# Altium PCB PCB1.PcbDoc
Units mm, origin at the board's own origin, x right, y up, seen from the top; angles counter-clockwise.
Board outline 32.77 x 38.86 mm, 2 copper layers (Top Layer, Bottom Layer); 43 components, 27 nets, 114 pads, 7 vias.
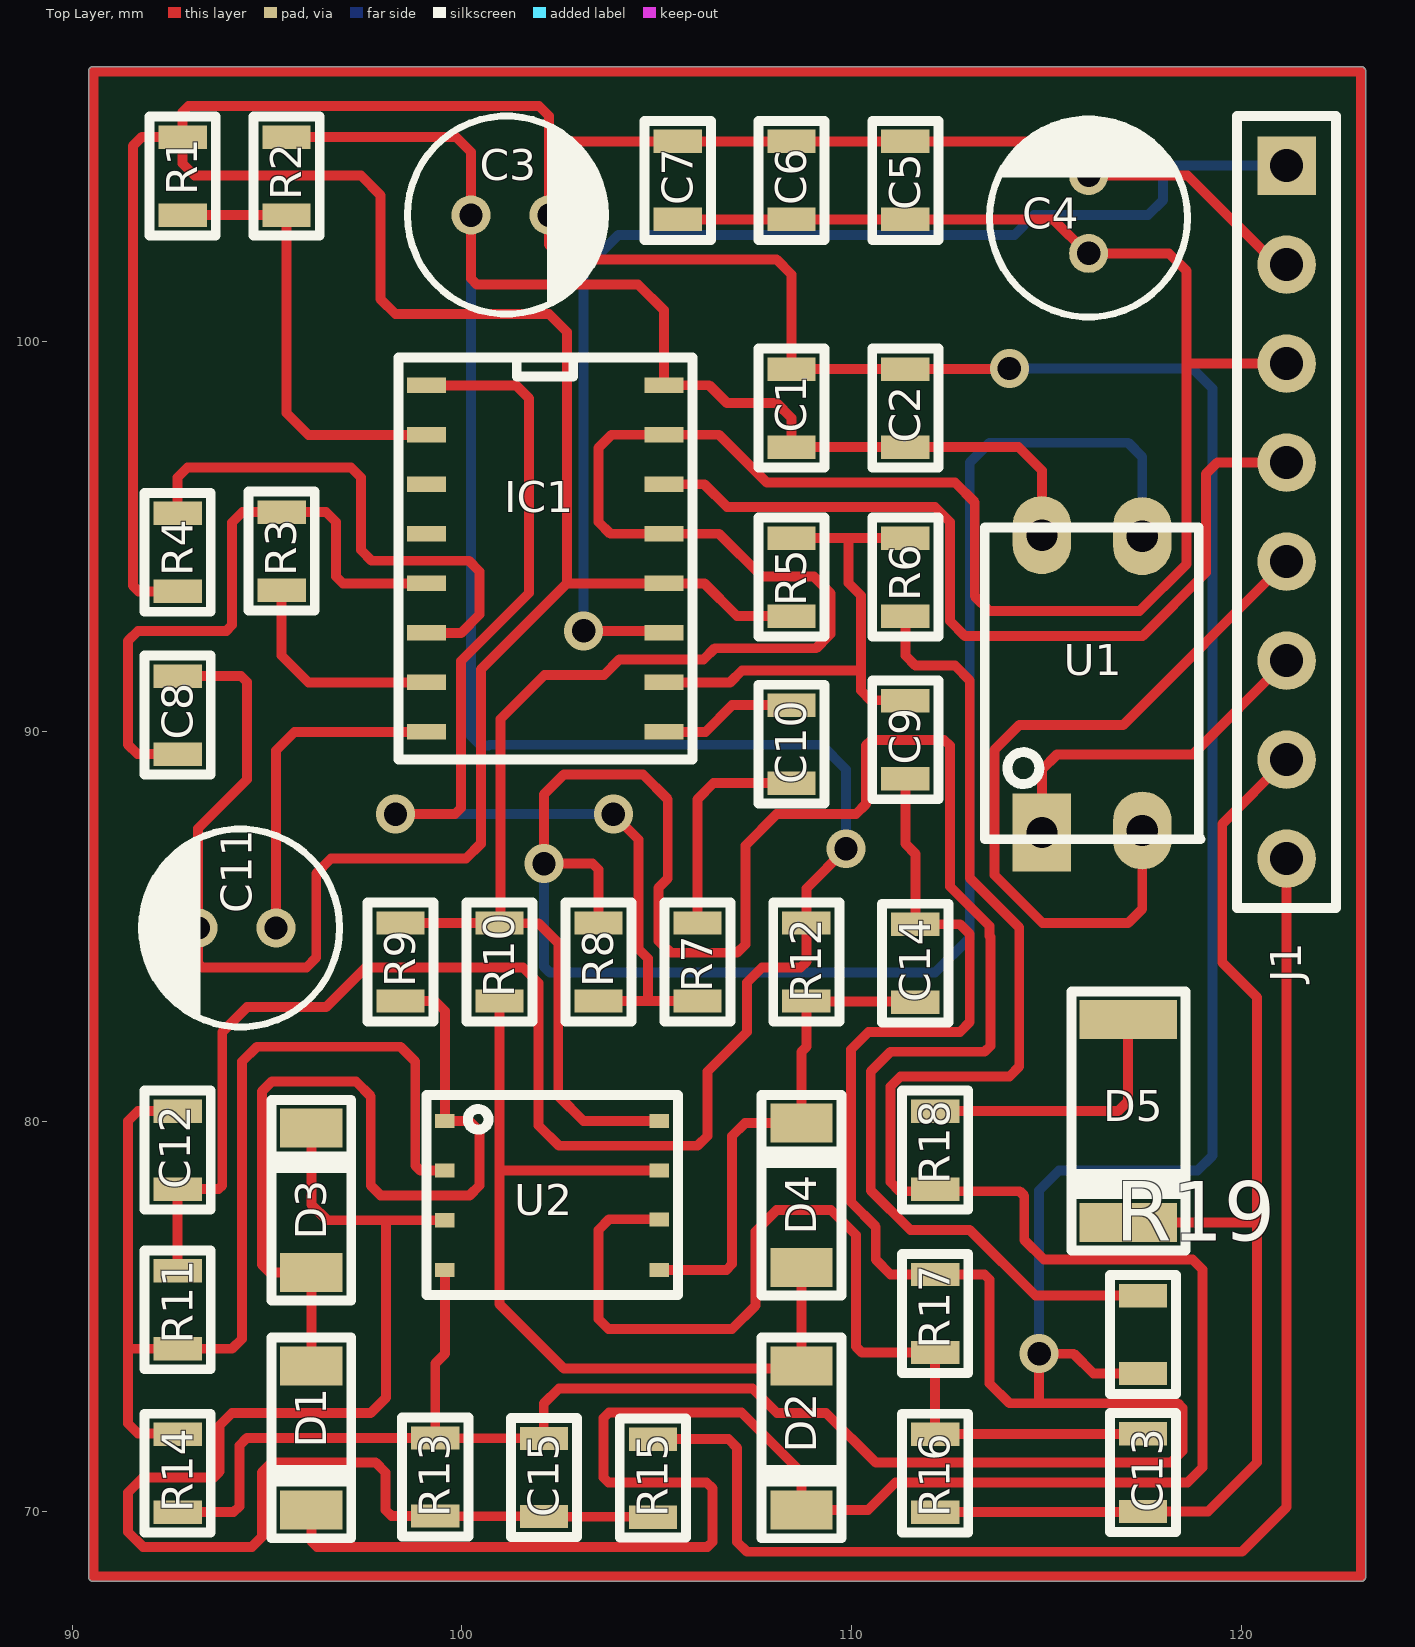
[diagram p0: Top Layer view]
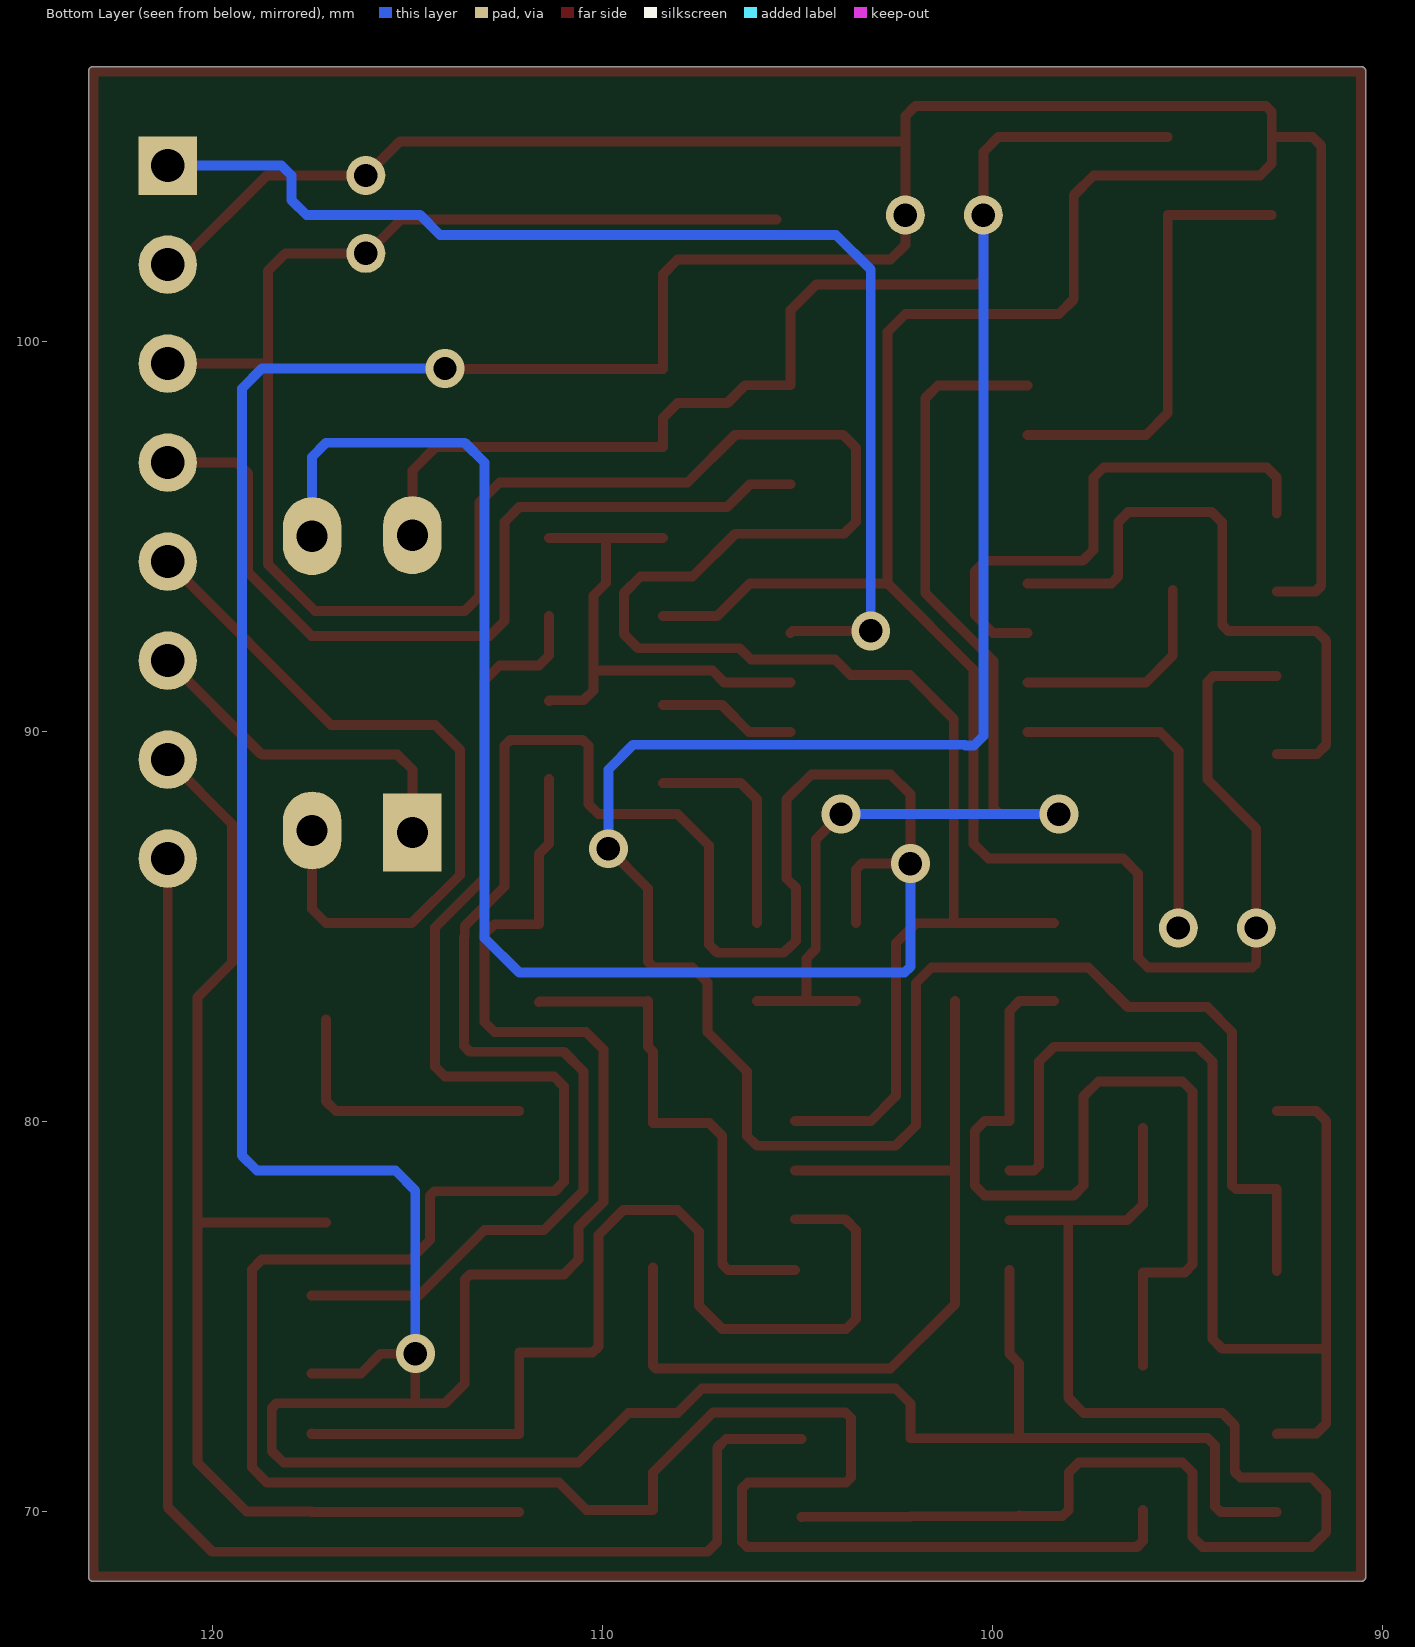
[diagram p1: Bottom Layer view, seen from below]

## Layer stack, top to bottom
Top Solder: solder mask 0.0102, Solder Resist, Dk 3.5
Top Layer: signal copper 0.0356
Dielectric 1: dielectric 0.32, FR-4, Dk 4.8
Bottom Layer: signal copper 0.0356
Bottom Solder: solder mask 0.0102, Solder Resist, Dk 3.5

## Board outline
90.424,68.326 ccw(c90.551,68.326) 90.551,68.199 123.063,68.199 ccw(c123.063,68.326) 123.19,68.326 123.19,106.934 ccw(c123.063,106.934) 123.063,107.061 90.551,107.061 ccw(c90.551,106.934) 90.424,106.934

## Design rules (kind name [scope] priority, off if disabled: settings)
Clearance [All] p1: gap=0.254 ignorepadtopadclearanceinfootprint=FALSE except(0: Arc-Hole Track-Hole SMDPad-Hole THPad-Hole Via-Hole Fill-Hole Poly-Hole Region-Hole Text-Hole)
PolygonConnect [All] p1: connectstyle=Relief reliefconductorwidth=0.254 reliefentries=4 polygonreliefangle="90 Angle" airgapwidth=0.254
RoutingVias [All] p1: holewidth=0.711 width=1.27 viastyle="Through Hole" minholewidth=0.711 minwidth=1.27 maxholewidth=0.711 maxwidth=1.27
SolderMaskExpansion [All] p1: expansion=0.102
Width [All] p1: maxlimit=0.254 minlimit=0.254 preferedwidth=0.254
30 further rules are at their usual default settings.

## Components (designator, comment, footprint, x,y, rotation, side; value= is the part's Value field where it differs from the comment)
C1 "104" C0805 108.458,98.298 r270 top
C2 "104" C0805 111.379,98.298 r90 top
C3 "10uF" CAP_RAD_4mm 101.235,103.251 r0 top
C4 "10uF" CAP_RAD_4mm 116.078,103.267 r90 top
C5 "104" C0805 111.379,104.14 r270 top
C6 "104" C0805 108.458,104.14 r270 top
C7 "104" C0805 105.537,104.14 r270 top
C8 "222" C0805 92.71,90.424 r270 top
C9 "102" C0805 111.379,89.789 r90 top
C10 "102" C0805 108.458,89.678 r90 top
C11 "10uF" CAP_RAD_4mm 94.234,84.963 r180 top
C12 "104" C0805 92.71,79.264 r270 top
C13 "104" C0805 117.475,70.993 r270 top
C14 "104" C0805 111.633,84.058 r270 top
C15 "104" C0805 102.108,70.866 r90 top
D1 "1N4148" SOD-80 96.139,71.882 r270 top
D2 "1N4148" SOD-80 108.712,71.882 r270 top
D3 "1N4148" SOD-80 96.139,77.978 r90 top
D4 "1N4148" SOD-80 108.712,78.105 r90 top
D5 "Zener" DO-213AB 117.094,80.01 r270 top
IC1 "Pulse width modulator control circuits" SO16 102.235,94.742 r0 top
J1 "Header 8x1 TH Pitch 2.54mm" "Header 8x1 TH Pitch 2.54mm" 121.158,95.631 r270 top
R1 "10K" R0805 92.837,103.251 r270 top
R2 "10K" R0805 95.504,105.251 r90 top
R3 "47" R0805 95.377,93.631 r270 top
R4 "15K" R0805 92.71,95.599 r90 top
R5 "10K" R0805 108.458,94.964 r90 top
R6 "4K7" R0805 111.379,94.964 r90 top
R7 "22k" R0805 106.045,83.09 r270 top
R8 "4K7" R0805 103.505,85.09 r90 top
R9 "10K" R0805 98.425,85.09 r90 top
R10 "10K" R0805 100.965,83.09 r270 top
R11 "100K" R0805 92.71,76.168 r90 top
R12 "200k" R0805 108.839,85.09 r90 top
R13 "20K" R0805 99.318,71.878 r90 top
R14 "80K" R0805 92.71,71.977 r90 top
R15 "2K2" R0805 104.902,69.85 r270 top
R16 "75k" R0805 112.141,69.977 r270 top
R17 "24k" R0805 112.141,74.073 r270 top
R18 "10k" R0805 112.141,80.264 r90 top
R19 "6K8" R0805 117.475,75.533 r90 top
U1 "Opto Transitor" "DIP 4" 116.205,91.313 r90 top
U2 "LM393" SOIC08_1.27_6.0 102.318,78.103 r0 top

## Footprints (in the part's own frame and the unit in brackets; to place one, negate y for a bottom-side part, rotate by r counter-clockwise, add the part's x,y. Pads: shape width x height; smd on the part's side, far side on the other; paste and mask are expansions set on the pad)
C0805 [mm]
  rect 0.6x1.24 smd: 1(-1,0) 2(1,0)
  silkscreen extent -1.52,-0.85 1.53,0.85, body extent -1,-0.6 1,0.6, height 1
CAP_RAD_4mm [mm]
  round 1 hole 0.6: 1(-1,0) 2(1,0)
  silkscreen extent -2.63,-2.54 2.51,2.54, body extent -2.53,-2.53 2.52,2.53, height 7.29
"DIP 4" [mm]
  rect 2x1.5 hole 0.8: 1(-3.9,1.325)
  oval 2x1.5 hole 0.8: 2(-3.85,-1.25) 3(3.7,-1.25) 4(3.725,1.325)
  silkscreen extent -4.08,-2.75 3.93,2.79, body extent -4.08,-2.75 3.93,2.79, height 4.31
DO-213AB [mm]
  rect 1x2.5 smd: 1(-2.6,0) 2(2.6,0)
  silkscreen extent -3.32,-1.48 3.32,1.48, body extent -2.6,-1.3 2.6,1.3, height 2.64
"Header 8x1 TH Pitch 2.54mm" [mm]
  rect 1.5x1.5 hole 0.85: 1(-8.89,0)
  round 1.5 hole 0.85: 2(-6.35,0) 3(-3.81,0) 4(-1.27,0) 5(1.27,0) 6(3.81,0) 7(6.35,0) 8(8.89,0)
  silkscreen extent -10.16,-1.27 10.16,1.27, body extent -10.16,-1.27 10.16,1.27, height 8.89
R0805 [mm]
  rect 0.6x1.24 smd: 1(-2,0) 2(0,0)
  silkscreen extent -2.52,-0.85 0.53,0.85, body extent -2,-0.62 0,0.62, height 0.45
SO16 [mm]
  rect 1x0.4 smd: 1(-3.137,4.14) 2(-3.137,2.87) 3(-3.137,1.6) 4(-3.137,0.33) 5(-3.137,-0.94) 6(-3.137,-2.21) 7(-3.137,-3.48) 8(-3.137,-4.75) 9(2.948,-4.747) 10(2.948,-3.477) 11(2.948,-2.207) 12(2.948,-0.937) 13(2.948,0.333) 14(2.948,1.603) 15(2.948,2.873) 16(2.948,4.143)
  silkscreen extent -3.86,-5.46 3.68,4.85, body extent -3.17,-5.29 2.97,4.68, height 1.75
SOD-80 [mm]
  rect 1x1.6 smd: 1(-1.85,0) 2(1.85,0)
  silkscreen extent -2.58,-1.02 2.58,1.02, body extent -1.82,-0.8 1.88,0.8, height 1.6
SOIC08_1.27_6.0 [mm]
  rect 0.5x0.36 smd: 1(-2.75,1.913) 2(-2.75,0.637) 3(-2.75,-0.637) 4(-2.75,-1.913) 5(2.75,-1.913) 6(2.75,-0.613) 7(2.75,0.637) 8(2.75,1.913)
  silkscreen extent -3.22,-2.55 3.22,2.58, body extent -3,-2.45 3,2.45, height 1.75

## Part data
C1 C2 C5 C6 C7 C8 C9 C10 C12 C13 C14 C15: library part C0805
C3 C4 C11: library part Capacitor(Radian)
D1 D2 D3 D4: library part "1N4148 (SOD-80)"
D5: library part "Diode Zener"
IC1: library part SG3525AN
R1 R2 R3 R4 R5 R6 R7 R8 R9 R10 R11 R12 R13 R14 R15 R16 R17 R18 R19: library part "Resistor SMD"
U1: DatasheetVersion=Nov-2003, LatestRevisionDate=04-Mar-2005, LatestRevisionNote="Sch pins 3 & 4 Swapped.", PackageReference=DIP-4, Published=24-Mar-1999, Publisher="Altium Limited"

## Via types
v1: diameter 1, hole 0.6, Top Layer to Bottom Layer, 7 vias

## Nets (pads, with @x,y where several pads share a name; then routed paths per layer and width w, separated by ;. In a path a pad name is that pad's centre, name@x,y a point inside that pad or via, vN(x,y) a via of type N, cw(c..) or ccw(c..) an arc to the next point about the centre after c; other vN are vias at no path point)
+12: C4.1 C5.2 C6.2 C7.2 IC1.13 IC1.15 J1.3 R9.2 R10.1 U2.8 | length 78
  Top Layer w0.254: R9.2 R10.1 ; U2.8 103.119,80.015 102.474,80.66 102.474,84.575 101.966,85.083 100.972,85.083 R10.1 ; C7.2 C6.2 C5.2 115.173,103.14 116.046,102.267 C4.1 118.142,102.267 118.586,101.823 118.586,99.441 ; J1.3 118.586,99.441 ; R10.1 100.995,85.12 100.995,90.327 102.12,91.452 103.644,91.452 104.038,91.846 106.197,91.846 106.489,92.138 109.093,92.138 109.41,92.456 109.41,92.458 109.459,92.506 109.459,93.55 109.029,93.98 107.696,93.98 106.601,95.075 IC1.13 103.807,95.075 103.505,95.377 103.505,97.282 103.838,97.615 IC1.15 106.601,97.615 107.823,96.393 112.649,96.393 113.157,95.885 113.157,93.472 113.538,93.091 117.382,93.091 118.586,94.295 118.586,99.441
+BAT: C13.2 D5.2 J1.7 R16.2 | length 31.2
  Top Layer w0.254: R16.2 112.149,69.985 117.467,69.985 C13.2 119.142,69.993 120.396,71.247 120.396,77.41 ; D5.2 120.396,77.41 ; J1.7 119.507,87.63 119.507,84.074 120.396,83.185 120.396,77.41
GND: C1.1 C2.2 C3.2 C4.2 C5.1 C6.1 C7.1 C8.1 C9.1 C11.2 C14.1 C15.2 IC1.12 J1.2 R1.1 R4.1 R5.1 R13.2 R14.1 R17.1 R19.1 U2.4 | length 216.5
  Top Layer w0.254: R14.1 94.147,69.977 94.295,70.126 94.295,71.689 94.484,71.878 R13.2 ; C8.1 94.339,91.424 94.488,91.275 94.488,88.773 93.234,87.519 C11.2 93.234,84.058 93.345,83.947 96.012,83.947 96.266,84.201 96.266,86.36 96.647,86.741 100.106,86.741 100.487,87.122 100.487,91.597 102.695,93.805 ; R4.1 91.709,93.599 91.567,93.741 91.567,105.029 91.789,105.251 R1.1 ; U2.4 99.568,74.041 99.318,73.791 R13.2 ; R5.1 107.061,92.964 106.22,93.805 IC1.12 102.695,93.805 ; C9.1 111.379,87.122 111.633,86.868 C14.1 112.776,85.058 113.03,84.804 113.03,82.55 112.777,82.297 110.49,82.297 110.489,82.296 110.428,82.296 109.982,81.85 109.982,77.934 110.617,77.299 110.617,76.454 110.998,76.073 R17.1 113.411,76.073 113.538,75.946 113.538,73.279 114.046,72.771 114.808,72.771 ; C2.2 C1.1 108.458,101.727 108.077,102.108 102.616,102.108 102.235,102.489 C3.2 102.235,105.14 ; C2.2 111.387,99.306 114.038,99.306 v1(114.046,99.314) ; R19.1 116.205,73.533 115.697,74.041 v1(114.808,74.041) 114.808,72.771 ; J1.2 120.904,101.981 118.618,104.267 C4.2 115.205,105.14 C5.1 C6.1 C7.1 102.235,105.14 ; R1.1 92.837,104.57 93.14,104.267 97.409,104.267 97.917,103.759 97.917,101.092 98.298,100.711 102.235,100.711 102.695,100.251 102.695,93.805 ; R1.1 92.837,105.896 92.986,106.045 101.981,106.045 102.235,105.791 102.235,105.14 ; R13.2 99.324,71.872 102.102,71.872 102.102,72.765 102.489,73.152 107.453,73.152 108.083,72.523 109.341,72.523 110.617,71.247 118.188,71.247 118.491,71.55 118.491,72.644 118.364,72.771 114.808,72.771
  Bottom Layer w0.254: v1(114.046,99.314) 118.745,99.314 119.253,98.806 119.253,79.121 118.872,78.74 115.316,78.74 114.808,78.232 v1(114.808,74.041)
NetC8_2: C8.2 IC1.5 R3.1 | length 16.2
  Top Layer w0.254: C8.2 91.678,89.424 91.44,89.662 91.44,92.329 91.694,92.583 93.958,92.583 94.107,92.732 94.107,95.362 94.376,95.631 R3.1 96.52,95.631 96.774,95.377 96.774,93.98 96.952,93.802 IC1.5
NetC9_2: C9.2 IC1.10 R5.2 R6.2 | length 13.4
  Top Layer w0.254: IC1.10 106.886,91.265 107.188,91.567 110.236,91.567 ; R5.2 109.918,94.964 ; C9.2 111.363,90.805 110.49,90.805 110.236,91.059 110.236,91.567 ; R6.2 109.918,94.964 ; 109.918,94.964 109.918,93.809 110.236,93.492 110.236,91.567
NetC10_1: C10.1 R7.1 | length 5.8
  Top Layer w0.254: R7.1 106.045,88.265 106.458,88.678 C10.1
NetC10_2: C10.2 IC1.9 | length 3.6
  Top Layer w0.254: IC1.9 106.251,89.995 106.934,90.678 C10.2
NetC11_1: C11.1 IC1.8 | length 8.6
  Top Layer w0.254: C11.1 95.234,89.519 95.707,89.992 IC1.8
NetC12_1: C12.1 R11.1 R14.2 U2.2 | length 28.9
  Top Layer w0.254: R14.2 92.693,71.994 91.694,71.994 91.44,72.248 91.44,74.168 ; C12.1 91.694,80.264 91.44,80.01 91.44,74.168 ; U2.2 98.933,78.74 98.806,78.867 98.806,81.534 98.425,81.915 94.742,81.915 94.361,81.534 94.361,74.422 94.107,74.168 R11.1 91.44,74.168
NetC13_1: C13.1 R16.1 R17.2 U2.6 | length 25.7
  Top Layer w0.254: U2.6 103.779,77.49 103.505,77.216 103.505,74.93 103.759,74.676 106.934,74.676 107.531,75.273 107.531,77.178 108.077,77.724 109.474,77.724 110.109,77.089 110.109,74.222 110.258,74.073 R17.2 R16.1 112.149,71.985 117.467,71.985 C13.1
NetC14_2: C14.2 D4.2 R12.1 U2.5 | length 13.1
  Top Layer w0.254: U2.5 106.785,76.19 106.934,76.339 106.934,79.629 107.26,79.955 D4.2 108.712,81.788 108.839,81.915 R12.1 108.855,83.074 111.617,83.074 C14.2
NetC15_1: C15.1 D3.2 R13.1 R15.2 U2.3 | length 36.1
  Top Layer w0.254: D3.2 96.139,77.873 96.547,77.465 98.057,77.465 ; U2.3 98.057,77.465 ; R15.2 104.894,69.858 102.116,69.858 C15.1 102.102,69.872 99.324,69.872 R13.1 99.31,69.886 99.302,69.878 98.201,69.878 98.044,70.035 98.044,70.993 97.79,71.247 95.123,71.247 94.869,70.993 94.869,69.342 94.615,69.088 91.821,69.088 91.44,69.469 91.44,70.485 91.821,70.866 93.639,70.866 93.787,71.015 93.787,72.197 94.107,72.517 97.663,72.517 98.057,72.911 98.057,77.465
NetD1_1: D1.1 D3.1 R9.1 U2.1 | length 23
  Top Layer w0.254: D1.1 D3.1 95.068,76.128 94.869,76.327 94.869,80.772 95.123,81.026 97.282,81.026 97.663,80.645 97.663,78.359 97.917,78.105 100.203,78.105 100.457,78.359 100.457,79.757 100.199,80.015 U2.1 99.568,82.836 99.314,83.09 R9.1
NetD2_1: D2.1 D4.1 R10.2 U2.7 | length 22.9
  Top Layer w0.254: R10.2 100.965,78.74 ; U2.7 100.965,78.74 ; D4.1 D2.1 108.64,73.66 102.616,73.66 100.965,75.311 100.965,78.74
NetD5_1: D5.1 R18.2 | length 7.2
  Top Layer w0.254: R18.2 116.84,80.264 117.094,80.518 D5.1
NetIC1_1: IC1.1 R7.2 R8.1 | length 29
  Top Layer w0.254: v1(98.298,87.884) 99.822,87.884 99.979,88.041 99.979,91.808 101.727,93.555 101.727,98.552 101.397,98.882 IC1.1 ; R8.1 104.775,83.09 ; v1(103.886,87.884) 104.536,87.234 104.536,84.422 104.775,84.183 104.775,83.09 ; R7.2 104.775,83.09
  Bottom Layer w0.254: v1(98.298,87.884) v1(103.886,87.884)
NetIC1_2: IC1.2 R1.2 R2.1 | length 11.6
  Top Layer w0.254: R1.2 R2.1 95.504,98.171 96.063,97.612 IC1.2
NetIC1_6: IC1.6 R4.2 | length 13.6
  Top Layer w0.254: R4.2 92.71,96.52 92.964,96.774 97.155,96.774 97.409,96.52 97.409,94.659 97.685,94.383 100.181,94.383 100.457,94.107 100.457,93.004 99.985,92.532 IC1.6
NetIC1_7: IC1.7 R3.2 | length 5.7
  Top Layer w0.254: R3.2 95.377,91.948 96.063,91.262 IC1.7
NetIC1_11: IC1.11 J1.1 | length 30.9
  Top Layer w0.254: v1(103.124,92.583) 105.135,92.583 IC1.11
  Bottom Layer w0.254: v1(103.124,92.583) 103.124,101.854 104.013,102.743 114.173,102.743 114.681,103.251 117.602,103.251 117.983,103.632 117.983,104.267 118.237,104.521 J1.1
NetIC1_14: IC1.14 J1.4 | length 22.4
  Top Layer w0.254: IC1.14 106.22,96.345 106.807,95.758 112.141,95.758 112.522,95.377 112.522,92.837 112.903,92.456 117.466,92.456 119.094,94.084 119.094,96.615 119.38,96.901 J1.4
NetJ1_5: J1.5 U1.2 | length 19.2
  Top Layer w0.254: U1.2 117.455,85.451 117.094,85.09 114.899,85.09 113.665,86.324 113.665,89.535 114.3,90.17 116.967,90.17 J1.5
NetJ1_6: J1.6 U1.1 | length 9
  Top Layer w0.254: U1.1 114.88,89.027 115.261,89.408 118.745,89.408 J1.6
NetR8_2: R8.2 R19.2 U1.3 | length 79.9
  Top Layer w0.254: R8.2 103.505,86.465 103.356,86.614 v1(102.108,86.614) 102.108,88.392 102.616,88.9 104.648,88.9 105.283,88.265 105.283,86.233 105.044,85.994 105.044,84.632 105.267,84.409 105.283,84.409 105.364,84.328 107.061,84.328 107.273,84.54 107.273,87.08 108.077,87.884 110.109,87.884 110.363,88.138 110.363,89.64 110.512,89.789 112.373,89.789 112.522,89.64 112.522,86.03 113.538,85.014 113.538,84.753 113.56,84.731 113.56,81.937 113.411,81.788 110.998,81.788 110.49,81.28 110.49,78.232 111.506,77.216 113.03,77.216 114.713,75.533 R19.2
  Bottom Layer w0.254: v1(102.108,86.614) 102.108,83.969 102.257,83.82 112.141,83.82 113.03,84.709 113.03,96.901 113.538,97.409 117.094,97.409 117.455,97.048 U1.3
POI: J1.8 R15.1 | length 36
  Top Layer w0.254: R15.1 106.839,71.85 107.061,71.628 107.061,69.215 107.315,68.961 120.015,68.961 121.158,70.104 J1.8
SH_D: D1.2 D2.2 R6.1 R18.1 | length 68.5
  Top Layer w0.254: D1.2 96.139,69.237 96.288,69.088 106.299,69.088 106.426,69.215 106.426,70.59 106.277,70.739 103.759,70.739 103.632,70.866 103.632,72.39 103.773,72.531 107.174,72.531 108.712,70.993 D2.2 110.418,70.032 111.125,70.739 118.618,70.739 118.999,71.12 118.999,76.2 118.745,76.454 114.935,76.454 114.427,76.962 114.427,78.094 114.311,78.21 111.23,78.21 110.998,78.442 110.998,80.899 111.252,81.153 114.046,81.153 114.3,81.407 114.3,84.971 113.03,86.241 113.03,91.313 112.649,91.694 111.633,91.694 111.379,91.948 R6.1
Vref: C1.2 C2.1 C3.1 C12.2 IC1.16 R2.2 R11.2 R12.2 U1.4 | length 87.3
  Top Layer w0.254: R11.2 C12.2 93.758,78.264 93.853,78.359 93.853,82.296 94.488,82.931 96.52,82.931 97.536,83.947 101.567,83.947 101.966,83.548 101.966,79.898 102.489,79.375 106.045,79.375 106.299,79.629 106.299,81.28 107.315,82.296 107.315,83.566 107.696,83.947 108.69,83.947 108.839,84.096 R12.2 108.839,85.979 v1(109.855,86.995) ; R2.2 99.854,105.251 100.235,104.87 C3.1 100.235,101.622 100.384,101.473 104.521,101.473 105.183,100.811 IC1.16 106.347,98.885 106.807,98.425 108.077,98.425 108.458,98.044 C1.2 ; C1.2 C2.1 114.284,97.298 114.88,96.702 U1.4
  Bottom Layer w0.254: C3.1 100.235,89.884 100.479,89.64 100.689,89.64 100.711,89.662 109.22,89.662 109.855,89.027 v1(109.855,86.995)
pads on no net: IC1.3 IC1.4
copper on no net: | length 142.2
  Top Layer w0.254: 90.551,68.326 90.551,106.934 123.063,106.934 123.063,68.326 90.551,68.326

## Silkscreen, mask and mechanical layers (free items; w line width, h text height)
Mechanical 1:
  lines w0.254: 91.44,106.68 122.809,106.68 122.809,68.58 90.805,68.58 90.805,106.68 91.821,106.68